# Altium PCB PCB.PcbDoc
Units mm, origin at the board's own origin, x right, y up, seen from the top; angles counter-clockwise.
Board outline 34.92 x 42.55 mm, 2 copper layers (Top Layer, Bottom Layer); 16 components, 18 nets, 64 pads, 15 vias.
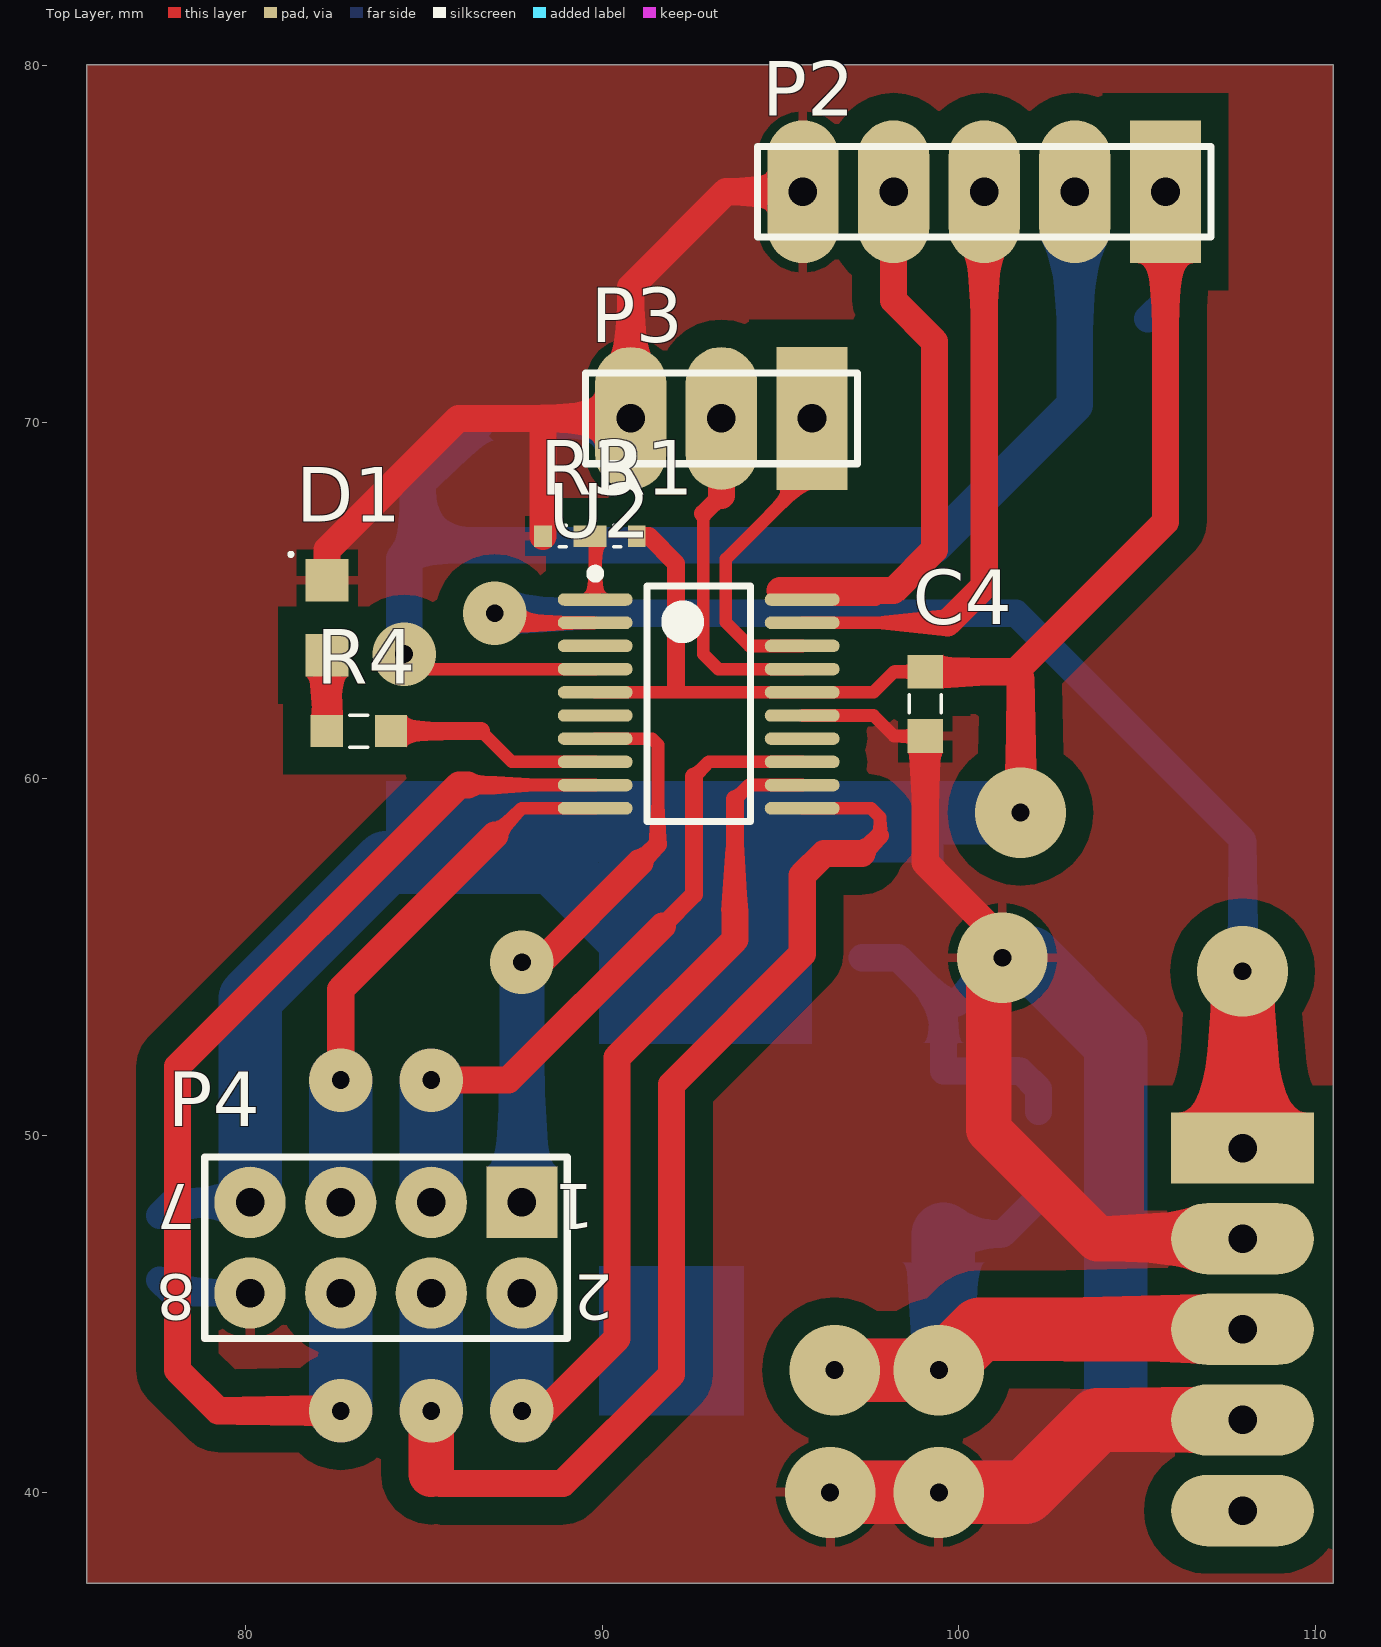
[diagram p0: Top Layer view]
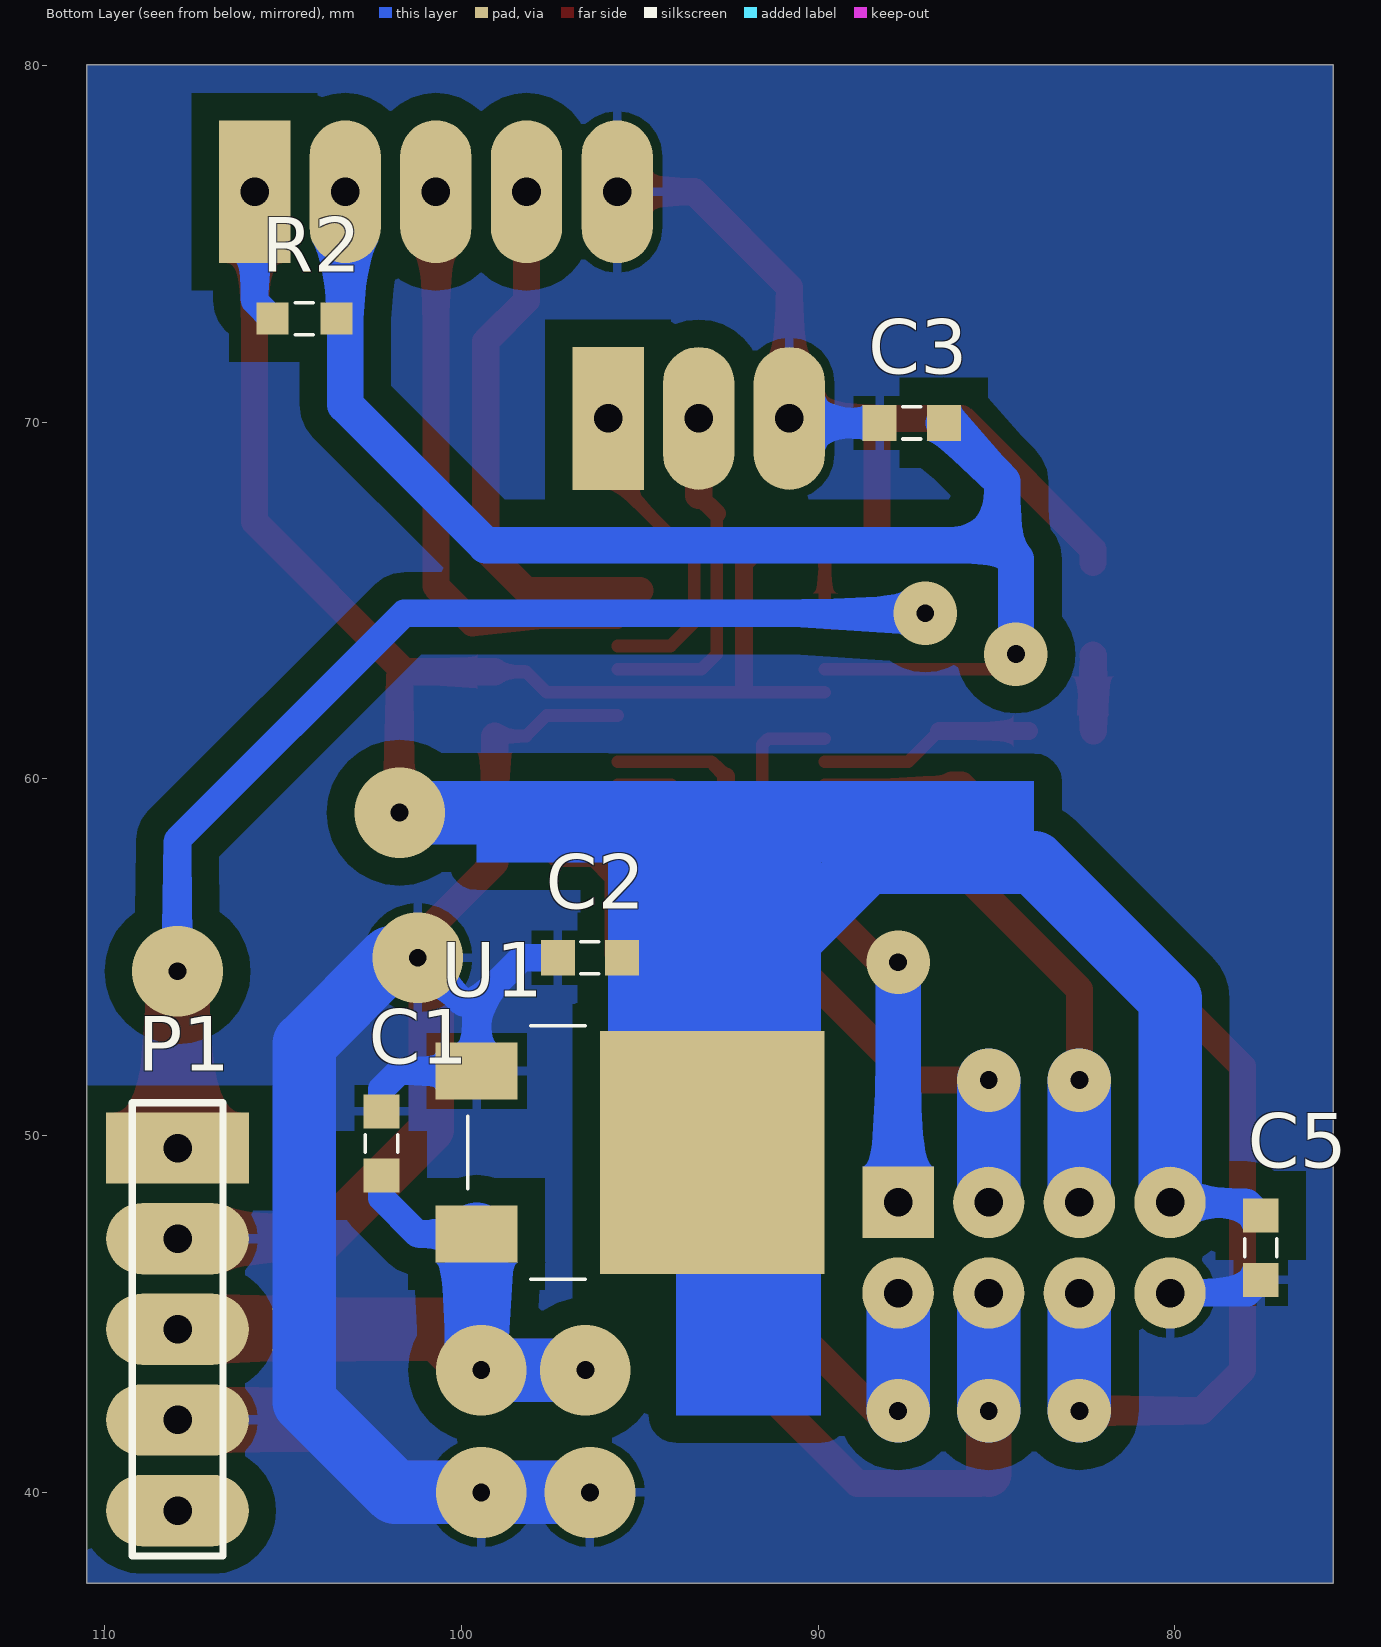
[diagram p1: Bottom Layer view, seen from below]
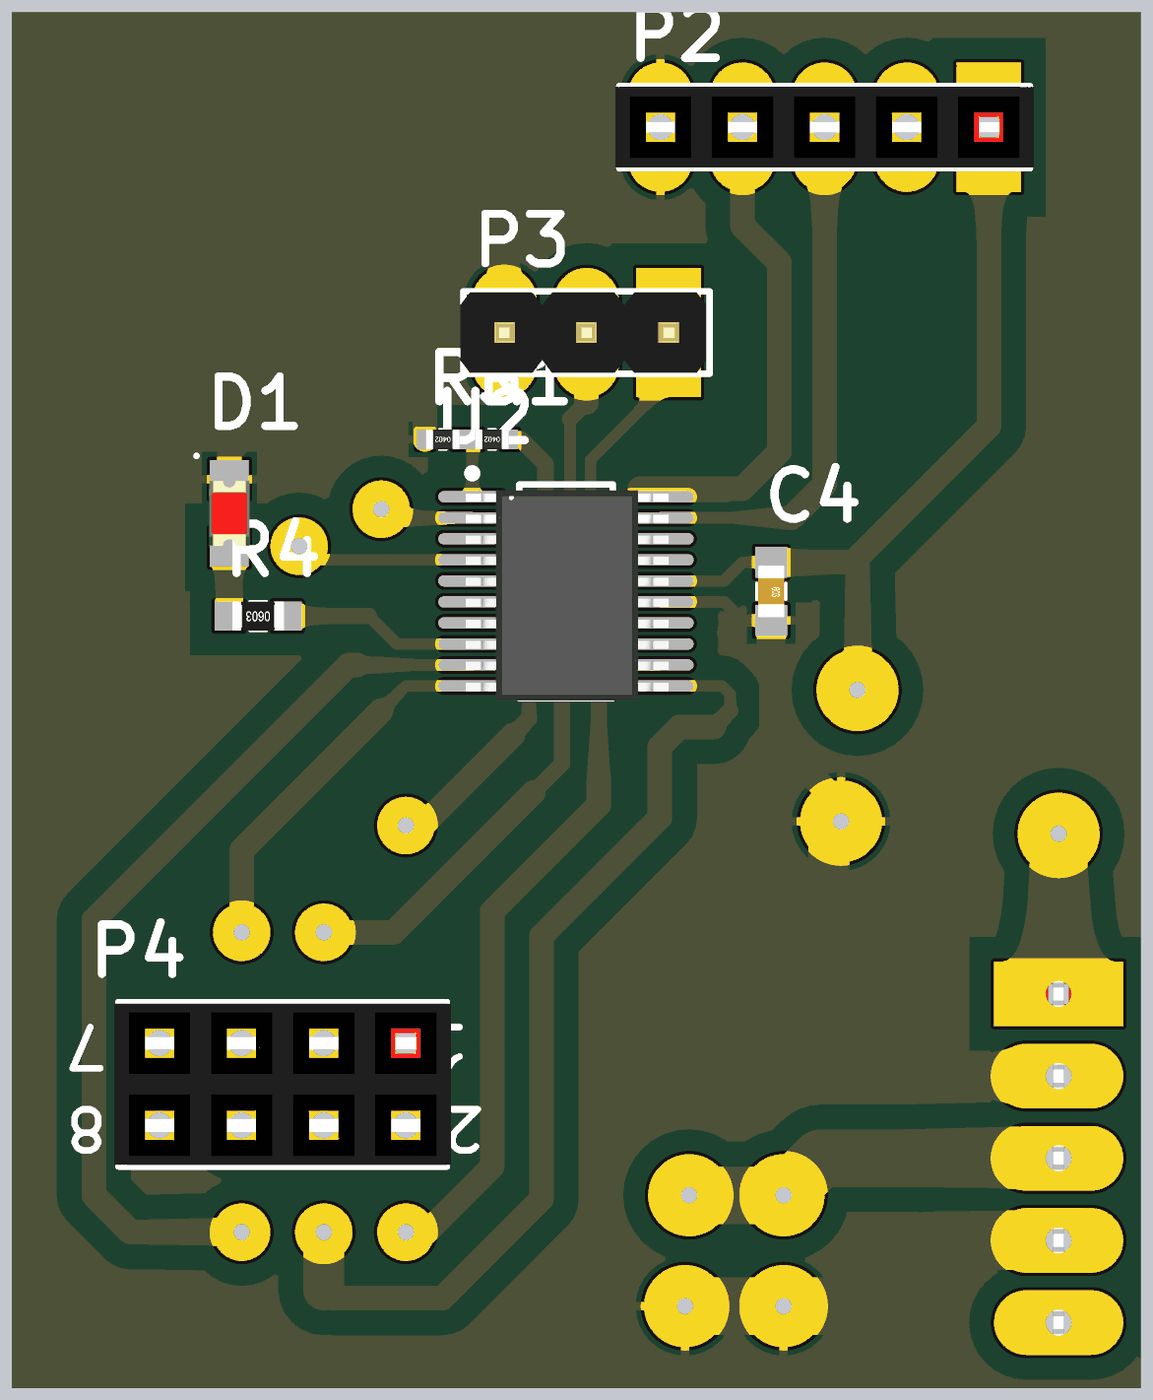
[diagram p2: 3D render of the assembled board from above, using the file's embedded part models]
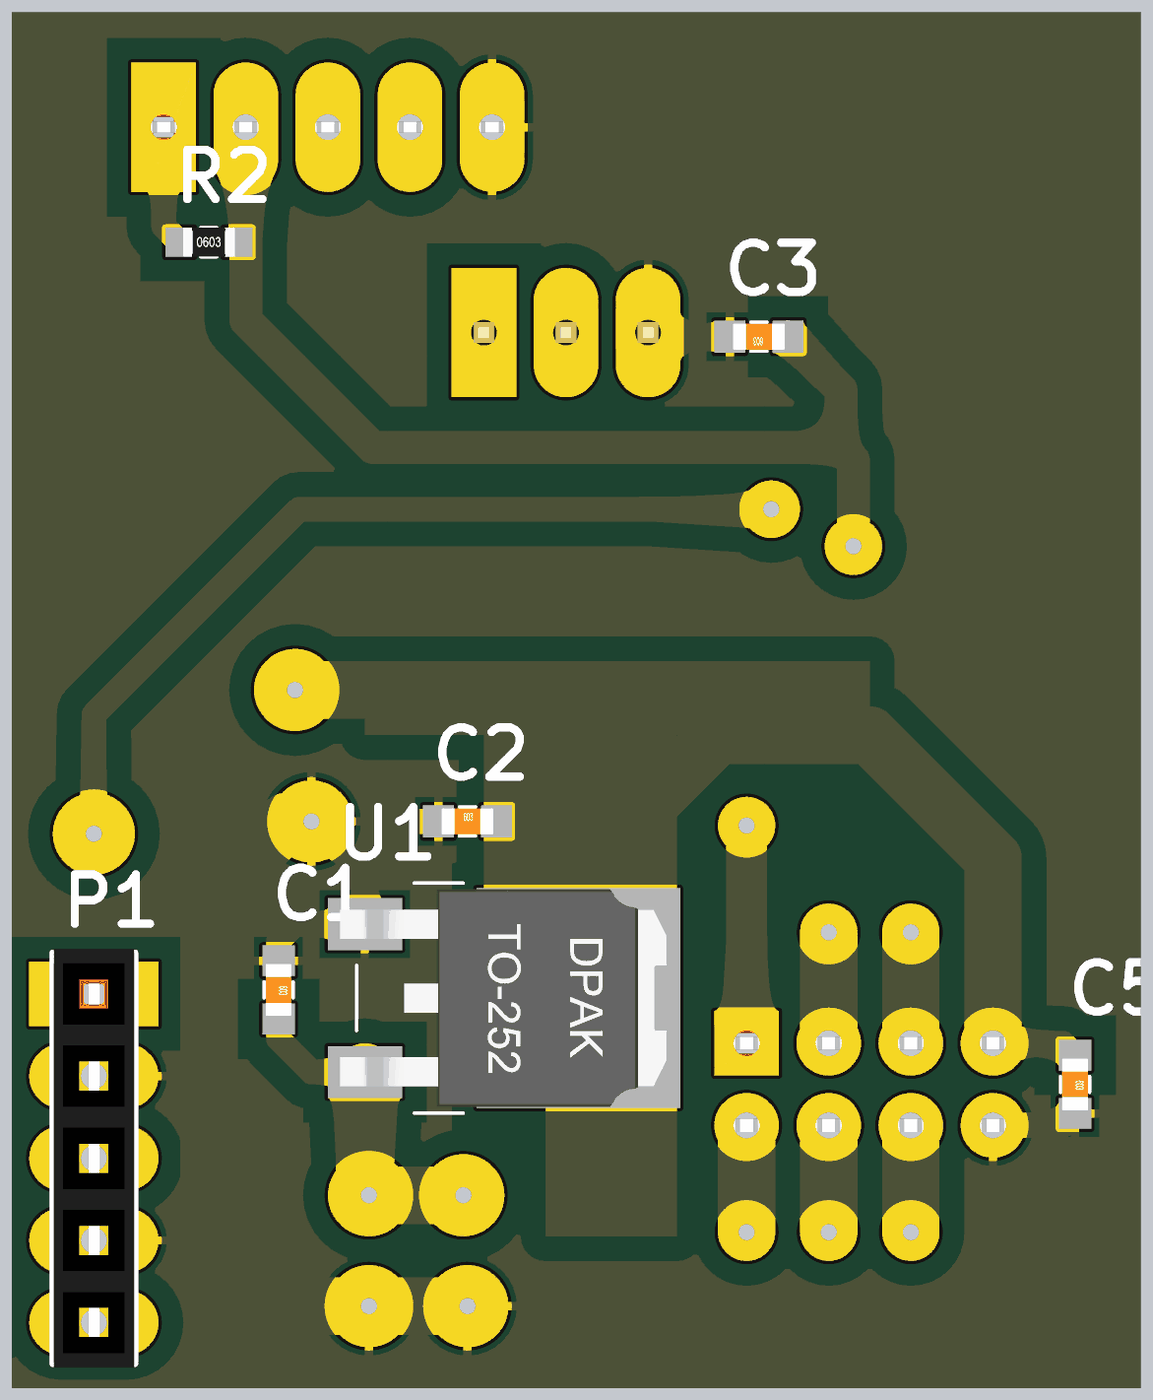
[diagram p3: 3D render of the assembled board from below, using the file's embedded part models]

## Layer stack, top to bottom
Top Solder: solder mask 0.0102, Solder Resist, Dk 3.5
Top Layer: signal copper 0.0356
Dielectric 1: dielectric 0.32, FR-4, Dk 4.8
Bottom Layer: signal copper 0.0356
Bottom Solder: solder mask 0.0102, Solder Resist, Dk 3.5

## Board outline
75.565,37.465 110.49,37.465 110.49,80.01 75.565,80.01

## Design rules (kind name [scope] priority, off if disabled: settings)
Clearance [All] p1: gap=0.508 except(0.254: SMDPad-SMDPad; 0.762: Arc-Poly Track-Poly SMDPad-Poly THPad-Poly Via-Poly Fill-Poly Poly-Poly Poly-Region Poly-Text)
PolygonConnect [All] p1: connectstyle=Relief reliefconductorwidth=0.254 reliefentries=4 polygonreliefangle="90 Angle" airgapwidth=0.254
RoutingVias [All] p1: holewidth=0.711 width=1.27 viastyle="Through Hole" minholewidth=0.711 minwidth=1.27 maxholewidth=0.711 maxwidth=1.27
SolderMaskExpansion [All] p1: expansion=0.102
Width [All] p1: maxlimit=2.54 minlimit=0.254 preferedwidth=0.508 minimp=50.000000 maximp=50.000000 favimp=50.000000
30 further rules are at their usual default settings.

## Components (designator, comment, footprint, x,y, rotation, side; value= is the part's Value field where it differs from the comment)
C1 "C" C0603 102.235,49.784 r270 bottom
C2 "C" C0603 96.393,54.991 r180 bottom
C3 "C" C0603 87.376,69.977 r0 bottom
C4 "C" C0603 99.06,62.103 r270 top
C5 "C" C0603 77.597,46.863 r270 bottom
D1 "LEDX" "LED 0805 RED" 82.296,64.516 r90 top
P1 "Header 5" "HEADER 1X5 FEMALE" 107.95,49.657 r270 bottom
P2 "Header 5" "HEADER 1X5 FEMALE" 105.791,76.454 r180 top
P3 "Header 3" "HEADER 1X3 MALE" 95.885,70.104 r180 top
P4 "Header 4X2" "HEADER 2X4 FEMALE" 87.757,48.133 r180 top
R1 "R" 0402 90.424,66.802 r180 top
R2 "R" 0603 104.394,72.898 r180 bottom
R3 "R" 0402 88.9,66.802 r180 top
R4 "R" 0603 83.185,61.341 r180 top
U1 "LD1117" TO-252 89.662,49.53 r270 bottom
U2 "STM32F030F4P6" SSOP20_M 92.71,62.103 r0 top

## Footprints (in the part's own frame and the unit in brackets; to place one, negate y for a bottom-side part, rotate by r counter-clockwise, add the part's x,y. Pads: shape width x height; smd on the part's side, far side on the other; paste and mask are expansions set on the pad)
0402 [mm] "SMD Resistor, Inch 0402, Metric 1005."
  rect 0.5x0.6 smd: 1(-0.55,0) 2(0.55,0)
  silkscreen extent -0.1,-0.3 0.1,0.3, body extent -0.52,-0.3 0.52,0.3, height 0.34
0603 [mm] "SMD Resistor, Inch 0603, Metric 1608."
  rect 0.9x0.9 smd: 1(-0.9,0) 2(0.9,0)
  silkscreen extent -0.25,-0.45 0.25,0.45, body extent -0.8,-0.45 0.8,0.45, height 0.5
C0603 [mm] "SMD Capacitor, Inch 0603, Metric 1608."
  rect 0.95x1 smd: 1(-0.9,0) 2(0.9,0)
  silkscreen extent -0.25,-0.45 0.25,0.45, body extent -0.8,-0.4 0.8,0.4, height 0.3
"HEADER 1X3 MALE" [mm] "Connector; Header; 3 Position, Male"
  rect 2x4 hole 0.8: 1(0,0)
  oval 2x4 hole 0.8: 2(2.54,0) 3(5.08,0)
  silkscreen extent -1.27,-1.27 6.35,1.27, body extent -1.17,-1.25 6.45,1.25, height 8.2
"HEADER 1X5 FEMALE" [mm] "Connector; Header; 5 Position, Female"
  rect 2x4 hole 0.8: 1(0,0)
  oval 2x4 hole 0.8: 2(2.54,0) 3(5.08,0) 4(7.62,0) 5(10.16,0)
  silkscreen extent -1.27,-1.27 11.43,1.27, body extent -1.39,-1.25 11.56,1.25, height 8.5
"HEADER 2X4 FEMALE" [mm] "Connector; Header; 4x2 Position; Female"
  rect 2x2 hole 0.8: 1(0,0)
  round 2 hole 0.8: 2(0,2.54) 3(2.54,0) 4(2.54,2.54) 5(5.08,0) 6(5.08,2.54) 7(7.62,0) 8(7.62,2.54)
  silkscreen extent -1.27,-1.27 8.89,3.81, body extent -1.39,-1.23 9.02,3.77, height 8.5
"LED 0805 RED" [mm] "SODFL, 2-Leads, Body 1,25x2,00mm, IPC Medium Density"
  rect 1.2x1.2 smd: 1(-1.05,0) 2(1.05,0)
  silkscreen extent 1.73,0.97 1.83,1.07, body extent -1.01,-0.62 1.01,0.63, height 1.1
SSOP20_M [mm] "SSOP, 20-Leads, Body 6.6x4.5mm, Pitch 0.65mm, IPC Low Density"
  oval 2.1x0.35 smd: 1(-2.9,2.925) 2(-2.9,2.275) 3(-2.9,1.625) 4(-2.9,0.975) 5(-2.9,0.325) 6(-2.9,-0.325) 7(-2.9,-0.975) 8(-2.9,-1.625) 9(-2.9,-2.275) 10(-2.9,-2.925) 11(2.9,-2.925) 12(2.9,-2.275) 13(2.9,-1.625) 14(2.9,-0.975) 15(2.9,-0.325) 16(2.9,0.325) 17(2.9,0.975) 18(2.9,1.625) 19(2.9,2.275) 20(2.9,2.925)
  silkscreen extent -3.02,-3.3 1.45,3.77, body extent -3.1,-3.38 3.17,3.12
TO-252 [mm] "JEDEC standard. TO-252, variant AA."
  rect 1.6x2.3 smd: 1(-2.286,-9.906) 3(2.286,-9.906)
  rect 6.8x6.3 smd: 4(0,-3.302)
  silkscreen extent -3.56,-10.16 3.56,-6.86, body extent -3.37,-10.67 3.37,-0.57, height 2.37

## Part data
C1 C2 C3 C4 C5: library part Cap, "Generic capacitor"
D1: "Typical LED"
P1 P2: "Header, 5-Pin"
P3: "Header, 3-Pin"
P4: "Header, 4-Pin, Dual row"
R1 R2 R3 R4: library part Res, "Generic resistor"
U1: "Low drop positive voltage regulator"
U2: "ARM Cortex-M0 32-bit MCU, 16 KB Flash, 4 KB Internal RAM, 15 I/Os, 20-pin TSSOP, -40 to 85 degC, Tube"

## Via types
v1: diameter 1.778, hole 0.5, Top Layer to Bottom Layer, 8 vias
v2: diameter 2.54, hole 0.5, Top Layer to Bottom Layer, 7 vias

## Nets (pads, with @x,y where several pads share a name; then routed paths per layer and width w, separated by ;. In a path a pad name is that pad's centre, name@x,y a point inside that pad or via, vN(x,y) a via of type N, cw(c..) or ccw(c..) an arc to the next point about the centre after c; other vN are vias at no path point)
3.3V: C2.2 C4.1 C5.1 P2.1 P4.7 R1.1 R2.1 U1.4 U2.5 U2.16 | length 80.3
  Top Layer w0.356: U2.5 U2.16 97.607,62.428 98.182,63.003 C4.1
  Top Layer w0.508: R1.1 91.313,66.802 92.075,66.04 92.075,62.611
  Top Layer w0.762: C4.1 101.589,63.003 ; v2(101.727,59.055) 101.727,62.865 101.589,63.003 ; P2.1@105.802,76.465 P2.1 105.791,67.205 101.589,63.003
  Bottom Layer w0.762: C5.1 77.967,48.133 P4.7 ; 92.964,53.721 94.234,54.991 C2.2 ; R2.1 105.791,73.395 P2.1
  Bottom Layer w1.778: P4.7 80.137,53.848 83.947,57.658 88.646,57.658 92.964,53.34 92.964,53.721 92.964,56.134 95.885,59.055 v2(101.727,59.055)
\RST: C3.1 P2.2 R2.2 U2.4 | length 38.9
  Top Layer w0.356: v1(84.455,63.5) 84.877,63.078 U2.4
  Bottom Layer w1.016: v1(84.455,63.5) 84.455,66.167 84.836,66.548 ; C3.1 84.836,68.337 84.836,66.548 ; P2.2 103.251,70.485 99.314,66.548 84.836,66.548
BATT: C1.2 P1.3 U1.3 | length 22.8
  Top Layer w1.778: v2(96.52,43.434) v2(99.441,43.434) ; v2@99.187,43.18 v2(99.441,43.434) ; P1.3 100.584,44.577 v2(99.441,43.434)
  Bottom Layer w0.762: U1.3 101.219,47.244 102.235,48.26 C1.2
  Bottom Layer w1.778: v2(96.52,43.434) v2(99.441,43.434) 99.568,43.561 U1.3
BOOT0: R1.2 R3.1 U2.1 | length 1.8
  Top Layer w0.356: U2.1 R1.2@89.81,66.802
CE: P4.6 U2.9 | length 31.8
  Top Layer w0.356: 87.006,59.828 U2.9
  Top Layer w0.508: 86.244,59.828 87.006,59.828
  Top Layer w0.762: v1(82.677,42.291) 79.248,42.291 78.105,43.434 78.105,51.943 85.99,59.828 86.244,59.828
  Bottom Layer w1.778: v1(82.677,42.291) P4.6
CSN: P4.5 U2.10 | length 15.2
  Top Layer w0.356: 86.995,58.42 87.753,59.178 U2.10
  Top Layer w0.762: v1(82.677,51.562) 82.677,54.102 86.995,58.42
  Bottom Layer w1.778: P4.5 v1(82.677,51.562)
GND: C1.1 C2.1 C3.2 C4.2 C5.2 D1.2 P1.2 P1.4 P2.5 P3.3 P4.8 R3.2 U1.1 U2.15 | length 99.1
  Top Layer w0.356: P3.3 P3.3@90.974,69.935 ; U2.15 97.607,61.778 98.182,61.203 C4.2
  Top Layer w0.762: D1.2@82.296,66.074 82.296,66.421 85.979,70.104 88.265,70.104 ; R3.2 88.35,70.019 88.265,70.104 ; P2.5@95.631,77.343 P2.5 93.472,76.454 90.805,73.787 P3.3 88.265,70.104 ; C4.2 99.06,57.658 101.219,55.499 v2(101.219,54.991)
  Top Layer w1.27: v2@100.838,54.229 100.838,50.165 103.886,47.117 P1.2
  Top Layer w1.778: v2@96.266,40.005 v2(96.393,40.005) v2(99.441,40.005) 101.854,40.005 103.886,42.037 P1.4
  Bottom Layer w0.762: C5.2 77.967,45.593 P4.8 ; C3.2 90.678,69.977 P3.3 ; C2.1 98.298,54.991 99.568,53.721 ; v2(101.219,54.991) 99.949,53.721 99.568,53.721 ; C1.1 102.235,51.308 101.727,51.816 U1.1 99.568,53.721
  Bottom Layer w1.778: v2(96.393,40.005) v2(99.441,40.005) 101.854,40.005 104.394,42.545 104.394,52.578 101.981,54.991 v2(101.219,54.991)
IRQ: P4.1 U2.7 | length 16.5
  Top Layer w0.356: U2.7 91.399,61.128 91.567,60.96 91.567,58.166
  Top Layer w0.508: 91.059,57.658 91.567,58.166
  Top Layer w0.762: v1(87.757,54.864) 88.265,54.864 91.059,57.658
  Bottom Layer w1.27: P4.1 v1(87.757,54.864)
LED: R4.1 U2.8 | length 6.1
  Top Layer w0.356: 86.614,61.341 87.477,60.478 U2.8
  Top Layer w0.508: R4.1 86.614,61.341
MISO: P4.2 U2.12 | length 25.3
  Top Layer w0.356: 93.726,59.436 94.118,59.828 U2.12
  Top Layer w0.508: 93.726,56.261 93.726,59.436
  Top Layer w0.762: v1(87.757,42.291) 88.392,42.291 90.424,44.323 90.424,52.197 93.726,55.499 93.726,56.261
  Bottom Layer w1.778: v1(87.757,42.291) P4.2
MOSI: P4.3 U2.13 | length 19.4
  Top Layer w0.356: 92.583,60.071 92.99,60.478 U2.13
  Top Layer w0.508: 91.694,55.88 92.583,56.769 92.583,60.071
  Top Layer w0.762: v1(85.217,51.562) 87.376,51.562 91.694,55.88
  Bottom Layer w1.778: P4.3 v1(85.217,51.562)
NetD1_1: D1.1 R4.2 | length 2.1
  Top Layer w0.762: R4.2 82.285,63.455 D1.1
PPM: P1.1 U2.2 | length 34.8
  Top Layer w0.356: v1@87.26,64.378 U2.2
  Top Layer w1.778: P1.1 v2(107.95,54.61)
  Bottom Layer w0.762: v1(86.995,64.643) 101.6,64.643 107.95,58.293 v2(107.95,54.61)
RX: P3.1 U2.18 | length 9.1
  Top Layer w0.356: U2.18 94.133,63.728 93.472,64.389 93.472,66.167 95.885,68.58 P3.1
SCK: P4.4 U2.11 | length 34.1
  Top Layer w0.356: U2.11 97.54,59.178 97.79,58.928 97.79,58.42
  Top Layer w0.508: 97.282,57.912 97.79,58.42
  Top Layer w0.762: 85.217,40.513 85.471,40.259 88.9,40.259 91.948,43.307 91.948,51.435 95.61,55.097 95.61,57.298 96.224,57.912 97.282,57.912
  Top Layer w1.27: 85.217,40.513 v1(85.217,42.291)
  Bottom Layer w1.778: v1(85.217,42.291) P4.4
SWDCLK: P2.4 U2.20 | length 17.4
  Top Layer w0.356: U2.20 97.667,65.028
  Top Layer w0.762: 94.996,65.278 98.171,65.278 99.314,66.421 99.314,72.263 98.171,73.406 P2.4
SWDIO: P2.3 U2.19 | length 16.6
  Top Layer w0.356: U2.19 99.684,64.378
  Top Layer w0.762: 99.684,64.378 100.711,65.405 P2.3
TX: P3.2 U2.17 | length 9.8
  Top Layer w0.356: 92.837,67.437 92.837,63.5 93.259,63.078 U2.17
  Top Layer w0.508: 92.837,67.437 93.345,67.945
  Top Layer w0.762: 93.345,67.945 P3.2
pads on no net: P1.5 U2.3 U2.6 U2.14

## Polygon pours and split planes (outlines as drawn)
GND on Top Layer "Bottom Layer-No Net" (solid, remove dead copper, pour order 0): 75.565,37.465 110.49,37.465 110.49,80.01 75.565,80.01
GND on Bottom Layer "Bottom Layer-No Net" (solid, remove dead copper, pour order 2): 75.565,37.465 110.49,37.465 110.49,80.01 75.565,80.01

## Other copper
Bottom Layer:
  rectangle net 3.3V: 83.947,57.658 99.568,59.944
  rectangle net 3.3V: 89.916,42.164 93.98,46.355
  rectangle net 3.3V: 89.916,52.578 95.885,59.944

## Silkscreen, mask and mechanical layers (free items; w line width, h text height)
Mechanical 1:
  the board outline again, w0.127

## Text inside footprints (layer, text, board x,y; h text height)
P4: Top Overlay "8" at 78.613,46.101 h1.27 r180; Top Overlay "7" at 78.613,48.641 h1.27 r180; Top Overlay "1" at 89.789,48.641 h1.27 r180; Top Overlay "2" at 90.297,46.101 h1.27 r180